# Altium PCB MLX-BREAKOUT.PcbDoc
Units mil, origin at the board's own origin, x right, y up, seen from the top; angles counter-clockwise.
Board outline 560 x 505 mil, 2 copper layers (Top Layer, Bottom Layer); 3 components, 4 nets, 10 pads, 0 vias.
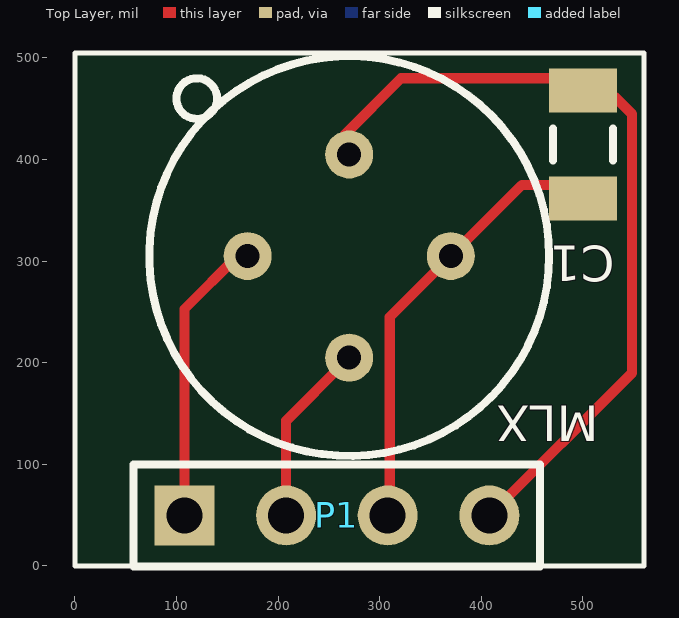
[diagram p0: Top Layer view]
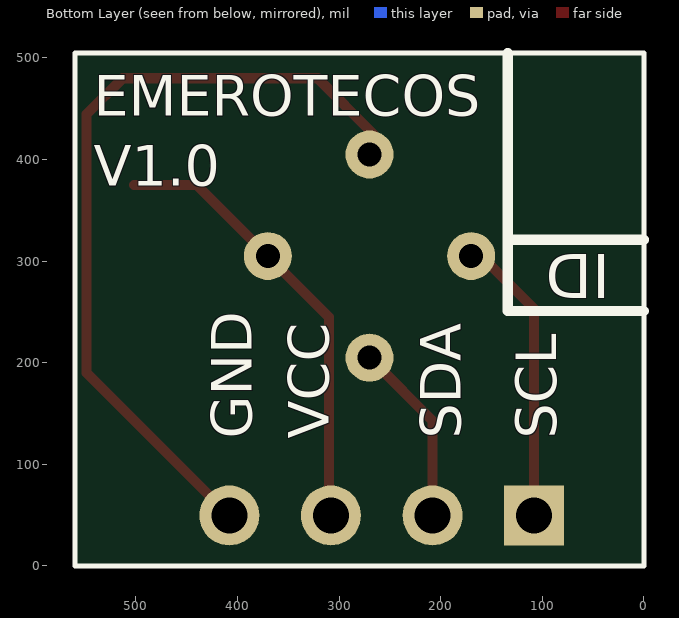
[diagram p1: Bottom Layer view, seen from below]

## Layer stack, top to bottom
Top Layer: signal copper 1.4
Dielectric: dielectric 12.6, FR-4, Dk 4.8
Bottom Layer: signal copper 1.4

## Board outline
0,0 0,505 560,505 560,0

## Design rules (kind name [scope] priority, off if disabled: settings)
Clearance [All] p1: gap=10
PolygonConnect [All] p1: connectstyle=Relief reliefconductorwidth=10 reliefentries=4 polygonreliefangle="90 Angle"
RoutingVias [All] p1: holewidth=28 width=50 viastyle="Through Hole" minholewidth=28 minwidth=50 maxholewidth=28 maxwidth=50
SilkscreenOverComponentPads [All] p1: minsilkscreentomaskgap=10
SolderMaskExpansion [All] p1: expansion=4
Width [All] p1: maxlimit=10 minlimit=10 preferedwidth=10
27 further rules are at their usual default settings.

## Components (designator, comment, footprint, x,y, rotation, side; value= is the part's Value field where it differs from the comment)
C1 "Cap Semi" C1206 500,415 r270 top
MLX "MLX90614" MLX90614 270,305 r90 top locked
P1 "Header 4" HDR1X4 107.97,49.65 r0 top

## Footprints (in the part's own frame and the unit in brackets; to place one, negate y for a bottom-side part, rotate by r counter-clockwise, add the part's x,y. Pads: shape width x height; smd on the part's side, far side on the other; paste and mask are expansions set on the pad)
C1206 [mm] "Chip Capacitor, Body 3.2x1.6mm, IPC High Density"
  rect 1.1x1.7 smd: 1(-1.35,0) 2(1.35,0)
  silkscreen extent -0.4,-0.75 0.4,0.75, body extent -1.7,-0.9 1.7,0.9, height 1.3
HDR1X4 [mm] "Connector; Header; 4 Position"
  rect 1.5x1.5 hole 0.9: 1(0,0)
  round 1.5 hole 0.9: 2(2.54,0) 3(5.08,0) 4(7.62,0)
  silkscreen extent -1.27,-1.27 8.89,1.27
MLX90614 [mm]
  round 1.2 hole 0.6: 1(0,2.54) 2(-2.54,0) 3(0,-2.54) 4(2.54,0)
  silkscreen extent -5,-5 5,5, body extent -6.54,-6.54 7.07,7.07, height 4.05

## Part data
C1: "Capacitor (Semiconductor SIM Model)"
P1: "Header, 4-Pin"

## Nets (pads, with @x,y where several pads share a name; then routed paths per layer and width w, separated by ;. In a path a pad name is that pad's centre, name@x,y a point inside that pad or via, vN(x,y) a via of type N, cw(c..) or ccw(c..) an arc to the next point about the centre after c; other vN are vias at no path point)
GND: C1.1 MLX.4 P1.4 | length 773
  Top Layer w10: MLX.4@266,425 321,480 513,480 548.46,444.54 548.46,190.14 P1.4
NetC1_2: C1.2 MLX.3 P1.3 | length 441.7
  Top Layer w10: P1.3 310,51.68 310,245 440,375 C1.2@501.67,375
SCL: MLX.1 P1.1 | length 277.2
  Top Layer w10: P1.1 107.97,252.97 MLX.1@160.24,305.24
SDA: MLX.2 P1.2 | length 174.6
  Top Layer w10: P1.2 207.97,142.97 MLX.2@265.45,200.45

## Silkscreen, mask and mechanical layers (free items; w line width, h text height)
Top Overlay:
  the board outline again, w5
Bottom Overlay:
  lines w5: 0,0 0,505 560,505 560,0 0,0
  lines w10: 0,251 134,251 134,505 ; 0,321 134,321
  text "EMEROTECOS" at 541.34,442.91 h40
  text "V1.0" at 541.34,374.02 h40
  text "ID" at 33,307 h43.31 r180
  text "SCL" at 86,125 h40 r270
  text "SDA" at 180,125 h40 r270
  text "VCC" at 310,125 h40 r270
  text "GND" at 386,125 h40 r270